# Altium PCB Chess Clock Front Display PCB.PcbDoc
Units mm, origin at the board's own origin, x right, y up, seen from the top; angles counter-clockwise.
Board outline 175 x 60 mm, 2 copper layers (Top Layer, Bottom Layer); 118 components, 110 nets, 374 pads, 173 vias.
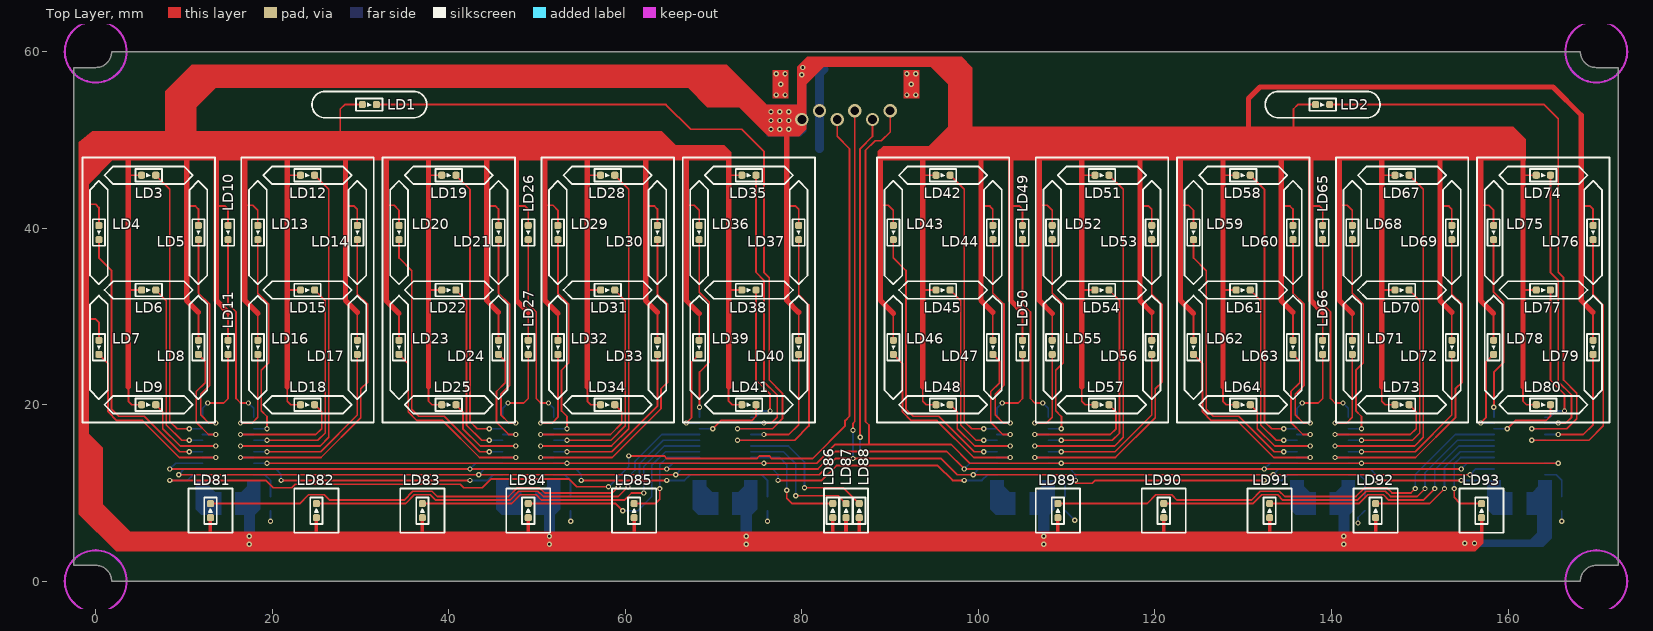
[diagram p0: Top Layer view]
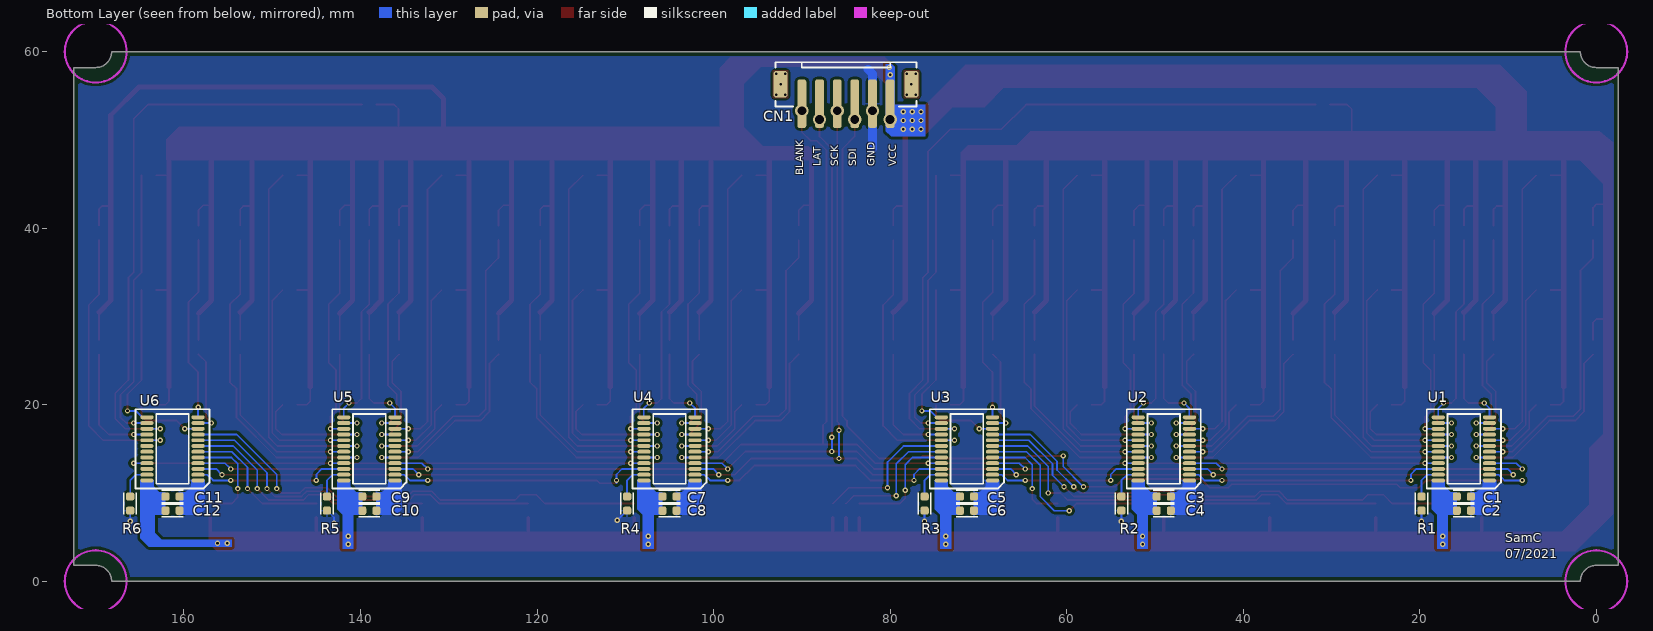
[diagram p1: Bottom Layer view, seen from below]
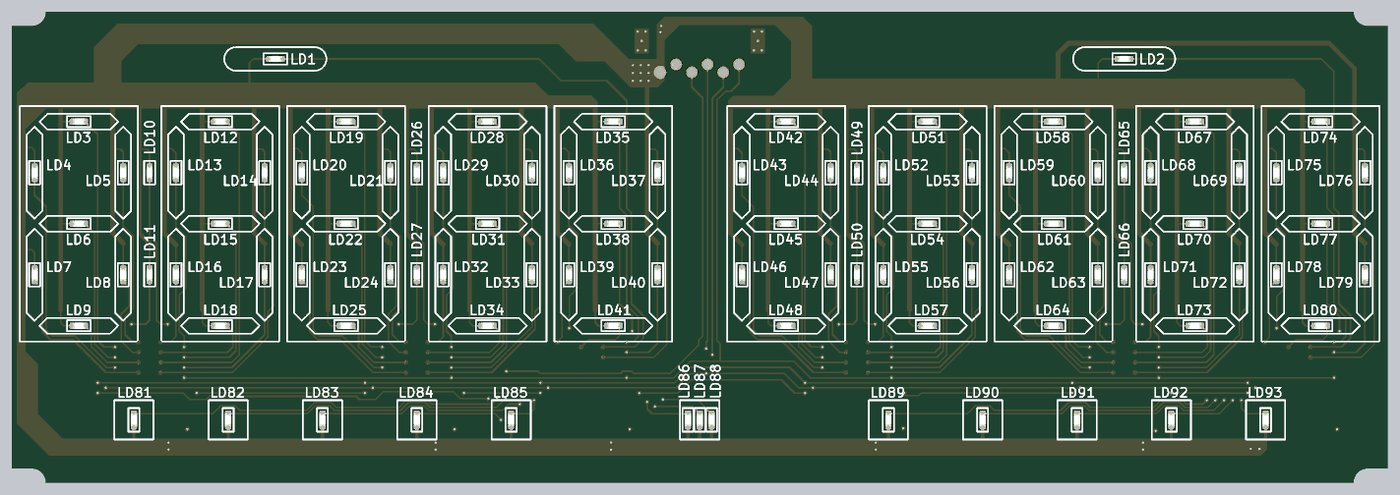
[diagram p2: 3D render of the assembled board from above, using the file's embedded part models]
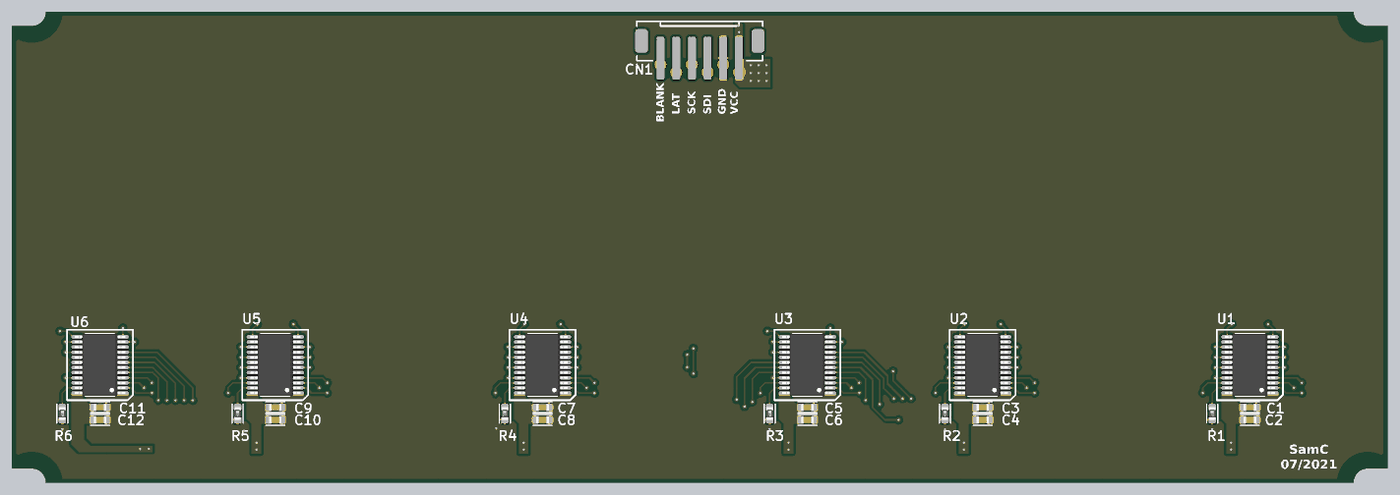
[diagram p3: 3D render of the assembled board from below, using the file's embedded part models]

## Layer stack, top to bottom
Top Solder: solder mask 0.0102, Solder Resist, Dk 3.5
Top Layer: signal copper 0.0356
Dielectric 1: dielectric 0.32, FR-4, Dk 4.8
Bottom Layer: signal copper 0.0356
Bottom Solder: solder mask 0.0102, Solder Resist, Dk 3.5

## Board outline
-2.5,1.8 0,1.8 cw(c0,0) 1.8,0 168.2,0 cw(c170,0) 170,1.8 172.5,1.8 172.5,58.2 170,58.2 cw(c170,60) 168.2,60 1.8,60 cw(c0,60) 0,58.2 -2.5,58.2

## Design rules (kind name [scope] priority, off if disabled: settings)
BoardOutlineClearance [All] p1: gap=0.5 ignorepadtopadclearanceinfootprint=FALSE
Clearance [All] p1: gap=0.3 ignorepadtopadclearanceinfootprint=FALSE except(0.2: Arc-Arc Arc-Track Arc-SMDPad Arc-THPad Arc-Via Arc-Text Arc-Hole Track-Track Track-SMDPad Track-THPad Track-Via Track-Text Track-Hole SMDPad-SMDPad SMDPad-THPad SMDPad-Via SMDPad-Text SMDPad-Hole THPad-THPad THPad-Via THPad-Text THPad-Hole Via-Via Via-Text Via-Hole Text-Text Text-Hole)
DiffPairsRouting [All] p1: maxlimit=0.5 minlimit=0.15 mostfreqgap=0.2 toplayer_minwidth=0.15 toplayer_maxwidth=1 toplayer_prefwidth=0.2 bottomlayer_minwidth=0.15 bottomlayer_maxwidth=1 bottomlayer_prefwidth=0.2 maxuncoupledlength=12.7
HoleSize [All] p1: absolutevalues=TRUE maxlimit=6 minlimit=0.025 maxpercent=80.000 minpercent=20.000
MinimumSolderMaskSliver [All] p1: minsoldermaskwidth=0
PlaneClearance [All] p1: clearance=0.5
PlaneConnect [All] p1: planeconnectstyle=Relief reliefexpansion=0.5 reliefentries=4 reliefconductorwidth=0.25 reliefairgap=0.25
PolygonConnect [All] p1: connectstyle=Relief reliefconductorwidth=0.25 reliefentries=4 polygonreliefangle="90 Angle" airgapwidth=0.25
RoutingVias [All] p1: holewidth=0.3 width=0.6 viastyle="Through Hole" minholewidth=0.3 minwidth=0.5 maxholewidth=2 maxwidth=7
SilkToSilkClearance [All] p1: silktosilkclearance=0
SilkToSolderMaskClearance [IsPad] p1: minsilkscreentomaskgap=0 clearancetoexposedcopper=TRUE
SolderMaskExpansion [All] p1: expansion=0.102 istentingtop=FALSE
Width [All] p1: maxlimit=20 minlimit=0.15 preferedwidth=0.2
23 further rules are at their usual default settings.

## Classes and differential pairs
net class DIG9_SEG[6..0]: DIG9_SEG0 DIG9_SEG1 DIG9_SEG2 DIG9_SEG3 DIG9_SEG4 DIG9_SEG5 DIG9_SEG6
net class DIG8_SEG[6..0]: DIG8_SEG0 DIG8_SEG1 DIG8_SEG2 DIG8_SEG3 DIG8_SEG4 DIG8_SEG5 DIG8_SEG6
net class DIG7_SEG[6..0]: DIG7_SEG0 DIG7_SEG1 DIG7_SEG2 DIG7_SEG3 DIG7_SEG4 DIG7_SEG5 DIG7_SEG6
net class DIG6_SEG[6..0]: DIG6_SEG0 DIG6_SEG1 DIG6_SEG2 DIG6_SEG3 DIG6_SEG4 DIG6_SEG5 DIG6_SEG6
net class DIG5_SEG[6..0]: DIG5_SEG0 DIG5_SEG1 DIG5_SEG2 DIG5_SEG3 DIG5_SEG4 DIG5_SEG5 DIG5_SEG6
net class DOT[7..0]: DOT0 DOT1 DOT2 DOT3 DOT4 DOT5 DOT6 DOT7
net class STATUS[11..1]: STATUS1 STATUS2 STATUS3 STATUS4 STATUS5 STATUS7 STATUS8 STATUS9 STATUS10 STATUS11
net class DIG4_SEG[6..0]: DIG4_SEG0 DIG4_SEG1 DIG4_SEG2 DIG4_SEG3 DIG4_SEG4 DIG4_SEG5 DIG4_SEG6
net class DIG3_SEG[6..0]: DIG3_SEG0 DIG3_SEG1 DIG3_SEG2 DIG3_SEG3 DIG3_SEG4 DIG3_SEG5 DIG3_SEG6
net class DIG2_SEG[6..0]: DIG2_SEG0 DIG2_SEG1 DIG2_SEG2 DIG2_SEG3 DIG2_SEG4 DIG2_SEG5 DIG2_SEG6
net class DIG1_SEG[6..0]: DIG1_SEG0 DIG1_SEG1 DIG1_SEG2 DIG1_SEG3 DIG1_SEG4 DIG1_SEG5 DIG1_SEG6
net class DIG0_SEG[6..0]: DIG0_SEG0 DIG0_SEG1 DIG0_SEG2 DIG0_SEG3 DIG0_SEG4 DIG0_SEG5 DIG0_SEG6

## Components (designator, comment, footprint, x,y, rotation, side; value= is the part's Value field where it differs from the comment)
C1 "100nF" CAPC0603X08N 15,9.6 r180 bottom
C2 "2.2uF" CAPC0603X08N 15,8 r180 bottom
C3 "100nF" CAPC0603X08N 49,9.6 r180 bottom
C4 "2.2uF" CAPC0603X08N 49,8 r180 bottom
C5 "100nF" CAPC0603X08N 71.3,9.6 r180 bottom
C6 "2.2uF" CAPC0603X08N 71.3,8 r180 bottom
C7 "100nF" CAPC0603X08N 105,9.6 r180 bottom
C8 "2.2uF" CAPC0603X08N 105,8 r180 bottom
C9 "100nF" CAPC0603X08N 139,9.6 r180 bottom
C10 "2.2uF" CAPC0603X08N 139,8 r180 bottom
C11 "100nF" CAPC0603X08N 161.3,9.6 r180 bottom
C12 "2.2uF" CAPC0603X08N 161.3,8 r180 bottom
CN1 "B6B-PH-SM4-TBT(LF)(SN)" B6B-PH-SM4-TBT(LF)(SN) 85,55.2 r180 bottom
LD1 "LED 0603" "LED 0603" 31,54 r0 top locked
LD2 "LED 0603" "LED 0603" 139,54 r0 top locked
LD3 "LED 0603" "LED 0603" 6,46 r0 top locked
LD4 "LED 0603" "LED 0603" 0.364,39.5 r270 top locked
LD5 "LED 0603" "LED 0603" 11.636,39.5 r270 top locked
LD6 "LED 0603" "LED 0603" 6,33 r0 top locked
LD7 "LED 0603" "LED 0603" 0.364,26.5 r270 top locked
LD8 "LED 0603" "LED 0603" 11.636,26.5 r270 top locked
LD9 "LED 0603" "LED 0603" 6,20 r0 top locked
LD10 "LED 0603" "LED 0603" 15,39.5 r270 top locked
LD11 "LED 0603" "LED 0603" 15,26.5 r270 top locked
LD12 "LED 0603" "LED 0603" 24,46 r0 top locked
LD13 "LED 0603" "LED 0603" 18.364,39.5 r270 top locked
LD14 "LED 0603" "LED 0603" 29.636,39.5 r270 top locked
LD15 "LED 0603" "LED 0603" 24,33 r0 top locked
LD16 "LED 0603" "LED 0603" 18.364,26.5 r270 top locked
LD17 "LED 0603" "LED 0603" 29.636,26.5 r270 top locked
LD18 "LED 0603" "LED 0603" 24,20 r0 top locked
LD19 "LED 0603" "LED 0603" 40,46 r0 top locked
LD20 "LED 0603" "LED 0603" 34.364,39.5 r270 top locked
LD21 "LED 0603" "LED 0603" 45.636,39.5 r270 top locked
LD22 "LED 0603" "LED 0603" 40,33 r0 top locked
LD23 "LED 0603" "LED 0603" 34.364,26.5 r270 top locked
LD24 "LED 0603" "LED 0603" 45.636,26.5 r270 top locked
LD25 "LED 0603" "LED 0603" 40,20 r0 top locked
LD26 "LED 0603" "LED 0603" 49,39.5 r270 top locked
LD27 "LED 0603" "LED 0603" 49,26.5 r270 top locked
LD28 "LED 0603" "LED 0603" 58,46 r0 top locked
LD29 "LED 0603" "LED 0603" 52.364,39.5 r270 top locked
LD30 "LED 0603" "LED 0603" 63.636,39.5 r270 top locked
LD31 "LED 0603" "LED 0603" 58,33 r0 top locked
LD32 "LED 0603" "LED 0603" 52.364,26.5 r270 top locked
LD33 "LED 0603" "LED 0603" 63.636,26.5 r270 top locked
LD34 "LED 0603" "LED 0603" 58,20 r0 top locked
LD35 "LED 0603" "LED 0603" 74,46 r0 top locked
LD36 "LED 0603" "LED 0603" 68.364,39.5 r270 top locked
LD37 "LED 0603" "LED 0603" 79.636,39.5 r270 top locked
LD38 "LED 0603" "LED 0603" 74,33 r0 top locked
LD39 "LED 0603" "LED 0603" 68.364,26.5 r270 top locked
LD40 "LED 0603" "LED 0603" 79.636,26.5 r270 top locked
LD41 "LED 0603" "LED 0603" 74,20 r0 top locked
LD42 "LED 0603" "LED 0603" 96,46 r0 top locked
LD43 "LED 0603" "LED 0603" 90.364,39.5 r270 top locked
LD44 "LED 0603" "LED 0603" 101.636,39.5 r270 top locked
LD45 "LED 0603" "LED 0603" 96,33 r0 top locked
LD46 "LED 0603" "LED 0603" 90.364,26.5 r270 top locked
LD47 "LED 0603" "LED 0603" 101.636,26.5 r270 top locked
LD48 "LED 0603" "LED 0603" 96,20 r0 top locked
LD49 "LED 0603" "LED 0603" 105,39.5 r270 top locked
LD50 "LED 0603" "LED 0603" 105,26.5 r270 top locked
LD51 "LED 0603" "LED 0603" 114,46 r0 top locked
LD52 "LED 0603" "LED 0603" 108.364,39.5 r270 top locked
LD53 "LED 0603" "LED 0603" 119.636,39.5 r270 top locked
LD54 "LED 0603" "LED 0603" 114,33 r0 top locked
LD55 "LED 0603" "LED 0603" 108.364,26.5 r270 top locked
LD56 "LED 0603" "LED 0603" 119.636,26.5 r270 top locked
LD57 "LED 0603" "LED 0603" 114,20 r0 top locked
LD58 "LED 0603" "LED 0603" 130,46 r0 top locked
LD59 "LED 0603" "LED 0603" 124.364,39.5 r270 top locked
LD60 "LED 0603" "LED 0603" 135.636,39.5 r270 top locked
LD61 "LED 0603" "LED 0603" 130,33 r0 top locked
LD62 "LED 0603" "LED 0603" 124.364,26.5 r270 top locked
LD63 "LED 0603" "LED 0603" 135.636,26.5 r270 top locked
LD64 "LED 0603" "LED 0603" 130,20 r0 top locked
LD65 "LED 0603" "LED 0603" 139,39.5 r270 top locked
LD66 "LED 0603" "LED 0603" 139,26.5 r270 top locked
LD67 "LED 0603" "LED 0603" 148,46 r0 top locked
LD68 "LED 0603" "LED 0603" 142.364,39.5 r270 top locked
LD69 "LED 0603" "LED 0603" 153.636,39.5 r270 top locked
LD70 "LED 0603" "LED 0603" 148,33 r0 top locked
LD71 "LED 0603" "LED 0603" 142.364,26.5 r270 top locked
LD72 "LED 0603" "LED 0603" 153.636,26.5 r270 top locked
LD73 "LED 0603" "LED 0603" 148,20 r0 top locked
LD74 "LED 0603" "LED 0603" 164,46 r0 top locked
LD75 "LED 0603" "LED 0603" 158.364,39.5 r270 top locked
LD76 "LED 0603" "LED 0603" 169.636,39.5 r270 top locked
LD77 "LED 0603" "LED 0603" 164,33 r0 top locked
LD78 "LED 0603" "LED 0603" 158.364,26.5 r270 top locked
LD79 "LED 0603" "LED 0603" 169.636,26.5 r270 top locked
LD80 "LED 0603" "LED 0603" 164,20 r0 top locked
LD81 "LED 0603" "LED 0603" 13,8 r90 top locked
LD82 "LED 0603" "LED 0603" 25,8 r90 top locked
LD83 "LED 0603" "LED 0603" 37,8 r90 top locked
LD84 "LED 0603" "LED 0603" 49,8 r90 top locked
LD85 "LED 0603" "LED 0603" 61,8 r90 top locked
LD86 "LED 0603" "LED 0603" 83.5,8 r90 top locked
LD87 "LED 0603" "LED 0603" 85,8 r90 top locked
LD88 "LED 0603" "LED 0603" 86.5,8 r90 top locked
LD89 "LED 0603" "LED 0603" 109,8 r90 top locked
LD90 "LED 0603" "LED 0603" 121,8 r90 top locked
LD91 "LED 0603" "LED 0603" 133,8 r90 top locked
LD92 "LED 0603" "LED 0603" 145,8 r90 top locked
LD93 "LED 0603" "LED 0603" 157,8 r90 top locked
R1 "6K8" RESC0603X04N 19.8,8.8 r270 bottom
R2 "6K8" RESC0603X04N 53.8,8.8 r270 bottom
R3 "6K8" RESC0603X04N 76.1,8.8 r270 bottom
R4 "6K8" RESC0603X04N 109.8,8.8 r270 bottom
R5 "6K8" RESC0603X04N 143.8,8.8 r270 bottom
R6 "6K8" RESC0603X04N 166.1,8.8 r270 bottom
U1 "TLC5928PW" TSOP65P640X120-24N 15,15 r0 bottom locked
U2 "TLC5928PW" TSOP65P640X120-24N 49,15 r0 bottom locked
U3 "TLC5928PW" TSOP65P640X120-24N 71.3,15 r0 bottom
U4 "TLC5928PW" TSOP65P640X120-24N 105,15 r0 bottom locked
U5 "TLC5928PW" TSOP65P640X120-24N 139,15 r0 bottom locked
U6 "TLC5928PW" TSOP65P640X120-24N 161.3,15 r0 bottom locked

## Footprints (in the part's own frame and the unit in brackets; to place one, negate y for a bottom-side part, rotate by r counter-clockwise, add the part's x,y. Pads: shape width x height; smd on the part's side, far side on the other; paste and mask are expansions set on the pad)
B6B-PH-SM4-TBT(LF)(SN) [mm] "CONN HEADER SMD 6POS 2MM"
  rrect50% 1.6x3 smd: 0(-7.4,1.1) 0(7.4,1.1)
  rrect50% 1x5.5 smd: 1(-5,-1.1) 2(-3,-1.1) 3(-1,-1.1) 4(1,-1.1) 5(3,-1.1) 6(5,-1.1)
  silkscreen extent -8,-1.4 8,3.6
CAPC0603X08N [mm] "Chip Capacitor, 2-Leads, Body 1.60x0.80mm, IPC Medium Density"
  rrect50% 0.9x0.95 smd: 1(-0.8,0) 2(0.8,0)
  silkscreen extent -1.2,-0.7 1.2,0.7, body extent -0.8,-0.41 0.8,0.41, height 0.84
"LED 0603" [mm] "LED 0603"
  rrect50% 0.8x0.8 smd: 1(-0.8,0) 2(0.8,0)
  silkscreen extent -1.5,-0.7 1.5,0.7, body extent -0.8,-0.4 0.8,0.4, height 0.29
RESC0603X04N [mm] "Chip Resistor, 2-Leads, Body 1.60x0.80mm, IPC Medium Density"
  rrect50% 0.9x0.95 smd: 1(-0.8,0) 2(0.8,0)
  silkscreen extent -1.2,-0.7 1.2,0.7, body extent -0.8,-0.4 0.8,0.4, height 0.46
TSOP65P640X120-24N [mm] "TSOP, 24-Leads, Body 7.80x4.40mm, Pitch 0.65mm, IPC Medium Density"
  oval 1.5x0.45 smd: 1(-2.9,3.575) 2(-2.9,2.925) 3(-2.9,2.275) 4(-2.9,1.625) 5(-2.9,0.975) 6(-2.9,0.325) 7(-2.9,-0.325) 8(-2.9,-0.975) 9(-2.9,-1.625) 10(-2.9,-2.275) 11(-2.9,-2.925) 12(-2.9,-3.575) 13(2.9,-3.575) 14(2.9,-2.925) 15(2.9,-2.275) 16(2.9,-1.625) 17(2.9,-0.975) 18(2.9,-0.325) 19(2.9,0.325) 20(2.9,0.975) 21(2.9,1.625) 22(2.9,2.275) 23(2.9,2.925) 24(2.9,3.575)
  silkscreen extent -4.2,-4.5 4.2,4.5, body extent -3.2,-3.95 3.2,3.95, height 1.2

## Part data
C1 C2 C3 C4 C5 C6 C7 C8 C9 C10 C11 C12: library part "GENERIC CAPC 0603", "Generic 0603 Capacitors", Manufacturer=-, Package=0603, Categories=Capacitors, Manufacturer Part Number=-, Supplier 1=Digi-Key, Supplier 2=LCSC, Supplier Part Number 1=-, Supplier Part Number 2=-, Temperature Coefficient=-, Tolerance=-, Voltage - Rated=-
  C1 C3 C5 C7 C9 C11: Capacitance=100nF
  C2 C4 C6 C8 C10 C12: Capacitance=2.2uF
CN1: "Connector Header Surface Mount 6 position 0.079\" (2.00mm)"
LD1 LD2 LD3 LD4 LD5 LD6 LD7 LD8 LD9 LD10 LD11 LD12 LD13 LD14 LD15 LD16 LD17 LD18 LD19 LD20 LD21 LD22 LD23 LD24 LD25 LD26 LD27 LD28 LD29 LD30 LD31 LD32 LD33 LD34 LD35 LD36 LD37 LD38 LD39 LD40 LD41 LD42 LD43 LD44 LD45 LD46 LD47 LD48 LD49 LD50 LD51 LD52 LD53 LD54 LD55 LD56 LD57 LD58 LD59 LD60 LD61 LD62 LD63 LD64 LD65 LD66 LD67 LD68 LD69 LD70 LD71 LD72 LD73 LD74 LD75 LD76 LD77 LD78 LD79 LD80 LD81 LD82 LD83 LD84 LD85 LD86 LD87 LD88 LD89 LD90 LD91 LD92 LD93: Manufacturer=-, Package=0603, Categories=LED, Manufacturer Part Number=-, Supplier 1=Digi-Key, Supplier 2=LCSC, Supplier Part Number 1=-, Supplier Part Number 2=-
R1 R2 R3 R4 R5 R6: library part "GENERIC RESC 0603", "Generic 0603 1%/5% Resistor", Manufacturer=-, Package=0603, Categories=Resistors, Manufacturer Part Number=-, Power (Watts)=-, Resistance=6K8, Supplier 1=Digi-Key, Supplier 2=LCSC, Supplier Part Number 1=-, Supplier Part Number 2=-, Temperature Coefficient=-, Tolerance=-
U1 U2 U3 U4 U5 U6: "LED Driver IC 16 Output Linear Shift Register  Dimming 35mA 24-TSSOP", Manufacturer="Texas Instruments", Package=24-TSSOP, Supplier Part Number 1=296-23819-5-ND, Categories="LED Drivers", Manufacturer Part Number=TLC5928PW, Supplier 1=Digi-Key, Supplier 2=LCSC, Supplier Part Number 2=C1554293

## Via types
v1: diameter 0.6, hole 0.3, Top Layer to Bottom Layer, tented both sides, 167 vias
v2: diameter 1.5, hole 1, Top Layer to Bottom Layer, 6 vias

## Nets (pads, with @x,y where several pads share a name; then routed paths per layer and width w, separated by ;. In a path a pad name is that pad's centre, name@x,y a point inside that pad or via, vN(x,y) a via of type N, cw(c..) or ccw(c..) an arc to the next point about the centre after c; other vN are vias at no path point)
BLANK: CN1.1 U1.21 U2.21 U3.21 U4.21 U5.21 U6.21 | length 196.6
  Top Layer w0.2: v1(19.4,13.375) v1(53.4,13.375) v1(75.7,13.375) 81.675,13.375 83.8,15.5 87.6,15.5 ; v2(90,53.3) 90,50.9 89,49.9 88.3,49.9 87.2,48.8 87.2,18.1 87.6,17.7 87.6,15.5 ; v1(165.7,13.375) v1(143.4,13.375) v1(109.4,13.375) 99.025,13.375 96.9,15.5 87.6,15.5
  Bottom Layer w0.2: U1.21 v1(19.4,13.375) ; U2.21 v1(53.4,13.375) ; U3.21 v1(75.7,13.375) ; U4.21 v1(109.4,13.375) ; U5.21 v1(143.4,13.375) ; U6.21 v1(165.7,13.375)
DIG0_SEG0: LD3.2 U1.10 | length 32.6
  Top Layer w0.2: LD3.2 8.4,44.4 8.4,18.1 9.225,17.275 v1(10.6,17.275)
  Bottom Layer w0.2: v1(10.6,17.275) U1.10
DIG0_SEG1: LD4.2 U1.6 | length 32.1
  Top Layer w0.2: LD4.2 0.364,36.636 1.8,35.2 1.8,19.5 2.6,18.7 5.5,18.7 9.525,14.675 v1(10.6,14.675)
  Bottom Layer w0.2: v1(10.6,14.675) U1.6
DIG0_SEG2: LD5.2 U1.11 | length 24.4
  Top Layer w0.2: LD5.2 11.636,32.664 12.9,31.4 12.9,22.2 11.9,21.2 11.9,18.85 12.825,17.925 v1(13.6,17.925)
  Bottom Layer w0.2: U1.11 v1(13.6,17.925)
DIG0_SEG3: LD6.2 U1.8 | length 20.6
  Top Layer w0.2: LD6.2 8,31.8 8,17.7 9.725,15.975 v1(10.6,15.975)
  Bottom Layer w0.2: v1(10.6,15.975) U1.8
DIG0_SEG4: LD7.2 U1.5 | length 22.8
  Top Layer w0.2: LD7.2 1.4,24.664 1.4,19.2 2.4,18.2 5.3,18.2 9.475,14.025 v1(13.6,14.025)
  Bottom Layer w0.2: U1.5 v1(13.6,14.025)
DIG0_SEG5: LD8.2 U1.9 | length 12.7
  Top Layer w0.2: LD8.2 12.4,24.936 12.4,22.5 11.4,21.5 11.4,18 12.775,16.625 v1(13.6,16.625)
  Bottom Layer w0.2: U1.9 v1(13.6,16.625)
DIG0_SEG6: LD9.2 U1.7 | length 11.3
  Top Layer w0.2: LD9.2 7.6,19.2 7.6,17.3 9.575,15.325 v1(13.6,15.325)
  Bottom Layer w0.2: U1.7 v1(13.6,15.325)
DIG1_SEG0: LD12.2 U1.18 | length 42.3
  Top Layer w0.2: v1(16.4,15.325) 25.425,15.325 26.4,16.3 26.4,44.4 LD12.2
  Bottom Layer w0.2: v1(16.4,15.325) U1.18
DIG1_SEG1: LD13.2 U1.15 | length 24
  Top Layer w0.2: LD13.2 18.364,32.636 19.6,31.4 19.6,24.736 18.764,23.9 18.764,19.3 19.4,18.664 v1(19.4,17.275)
  Bottom Layer w0.2: U1.15 v1(19.4,17.275)
DIG1_SEG2: LD14.2 U1.20 | length 38
  Top Layer w0.2: v1(16.4,14.025) 25.525,14.025 30.036,18.536 30.036,21.8 30.8,22.564 30.8,31.372 29.636,32.536 LD14.2
  Bottom Layer w0.2: v1(16.4,14.025) U1.20
DIG1_SEG3: LD15.2 U1.17 | length 25.1
  Top Layer w0.2: v1(19.4,15.975) 25.175,15.975 26,16.8 26,31.8 LD15.2
  Bottom Layer w0.2: U1.17 v1(19.4,15.975)
DIG1_SEG4: LD16.2 U1.14 | length 10.8
  Top Layer w0.2: v1(16.4,17.925) 17.7,17.925 18.364,18.589 LD16.2
  Bottom Layer w0.2: v1(16.4,17.925) U1.14
DIG1_SEG5: LD17.2 U1.19 | length 20.3
  Top Layer w0.2: v1(19.4,14.675) 25.475,14.675 29.636,18.836 LD17.2
  Bottom Layer w0.2: U1.19 v1(19.4,14.675)
DIG1_SEG6: LD18.2 U1.16 | length 14
  Top Layer w0.2: v1(16.4,16.625) 24.925,16.625 25.6,17.3 25.6,19.2 LD18.2
  Bottom Layer w0.2: v1(16.4,16.625) U1.16
DIG2_SEG0: LD19.2 U2.10 | length 32.6
  Top Layer w0.2: LD19.2 42.4,44.4 42.4,18.1 43.225,17.275 v1(44.6,17.275)
  Bottom Layer w0.2: v1(44.6,17.275) U2.10
DIG2_SEG1: LD20.2 U2.6 | length 32.1
  Top Layer w0.2: LD20.2 34.364,36.636 35.8,35.2 35.8,19.5 36.6,18.7 39.5,18.7 43.525,14.675 v1(44.6,14.675)
  Bottom Layer w0.2: v1(44.6,14.675) U2.6
DIG2_SEG2: LD21.2 U2.11 | length 24.4
  Top Layer w0.2: LD21.2 45.636,32.664 46.9,31.4 46.9,22.2 45.9,21.2 45.9,18.85 46.825,17.925 v1(47.6,17.925)
  Bottom Layer w0.2: U2.11 v1(47.6,17.925)
DIG2_SEG3: LD22.2 U2.8 | length 20.6
  Top Layer w0.2: LD22.2 42,31.8 42,17.7 43.725,15.975 v1(44.6,15.975)
  Bottom Layer w0.2: v1(44.6,15.975) U2.8
DIG2_SEG4: LD23.2 U2.5 | length 22.8
  Top Layer w0.2: LD23.2 35.4,24.664 35.4,19.2 36.4,18.2 39.3,18.2 43.475,14.025 v1(47.6,14.025)
  Bottom Layer w0.2: U2.5 v1(47.6,14.025)
DIG2_SEG5: LD24.2 U2.9 | length 12.7
  Top Layer w0.2: LD24.2 46.4,24.936 46.4,22.5 45.4,21.5 45.4,18 46.775,16.625 v1(47.6,16.625)
  Bottom Layer w0.2: U2.9 v1(47.6,16.625)
DIG2_SEG6: LD25.2 U2.7 | length 11.3
  Top Layer w0.2: LD25.2 41.6,19.2 41.6,17.3 43.575,15.325 v1(47.6,15.325)
  Bottom Layer w0.2: U2.7 v1(47.6,15.325)
DIG3_SEG0: LD28.2 U2.18 | length 41.7
  Top Layer w0.2: v1(50.4,15.325) 58.425,15.325 60.4,17.3 60.4,44.4 LD28.2
  Bottom Layer w0.2: v1(50.4,15.325) U2.18
DIG3_SEG1: LD29.2 U2.15 | length 24
  Top Layer w0.2: LD29.2 52.364,32.636 53.6,31.4 53.6,24.736 52.764,23.9 52.764,19.3 53.4,18.664 v1(53.4,17.275)
  Bottom Layer w0.2: U2.15 v1(53.4,17.275)
DIG3_SEG2: LD30.2 U2.20 | length 37.4
  Top Layer w0.2: v1(50.4,14.025) 58.525,14.025 64.036,19.536 64.036,21.8 64.8,22.564 64.8,31.372 63.636,32.536 LD30.2
  Bottom Layer w0.2: v1(50.4,14.025) U2.20
DIG3_SEG3: LD31.2 U2.17 | length 24.7
  Top Layer w0.2: v1(53.4,15.975) 58.375,15.975 60,17.6 60,31.8 LD31.2
  Bottom Layer w0.2: U2.17 v1(53.4,15.975)
DIG3_SEG4: LD32.2 U2.14 | length 10.8
  Top Layer w0.2: v1(50.4,17.925) 51.7,17.925 52.364,18.589 LD32.2
  Bottom Layer w0.2: v1(50.4,17.925) U2.14
DIG3_SEG5: LD33.2 U2.19 | length 19.7
  Top Layer w0.2: v1(53.4,14.675) 58.475,14.675 63.636,19.836 LD33.2
  Bottom Layer w0.2: U2.19 v1(53.4,14.675)
DIG3_SEG6: LD34.2 U2.16 | length 13.7
  Top Layer w0.2: v1(50.4,16.625) 58.325,16.625 59.6,17.9 59.6,19.2 LD34.2
  Bottom Layer w0.2: v1(50.4,16.625) U2.16
DIG4_SEG0: LD35.2 U3.14 | length 31.7
  Top Layer w0.2: LD35.2 74.8,35 75.7,34.1 75.7,22.6 77.2,21.1 77.2,18.6 76.525,17.925 v1(75.7,17.925)
  Bottom Layer w0.2: U3.14 v1(75.7,17.925)
DIG4_SEG1: LD36.2 U3.12 | length 21.1
  Top Layer w0.2: LD36.2 68.364,32.736 69.5,31.6 69.5,24.8 68.4,23.7 v1(68.4,19.7)
  Bottom Layer w0.2: U3.12 v1(68.4,19.7)
DIG4_SEG2: LD37.2 U3.17 | length 31.9
  Top Layer w0.2: v1(72.7,15.975) 79.175,15.975 80.8,17.6 80.8,31.3 79.636,32.464 LD37.2
  Bottom Layer w0.2: v1(72.7,15.975) U3.17
DIG4_SEG3: LD38.2 U3.13 | length 16.9
  Top Layer w0.2: LD38.2 74.8,22.8 76.4,21.2 v1(76.4,19.3)
  Bottom Layer w0.2: U3.13 74.725,18.575 75.45,19.3 v1(76.4,19.3)
DIG4_SEG4: LD39.2 U3.11 | length 9.9
  Top Layer w0.2: v1(66.9,17.925) 67.5,18.525 67.5,24.836 LD39.2
  Bottom Layer w0.2: v1(66.9,17.925) U3.11
DIG4_SEG5: LD40.2 U3.16 | length 13.9
  Top Layer w0.2: v1(75.7,16.625) 78.525,16.625 79.636,17.736 LD40.2
  Bottom Layer w0.2: U3.16 v1(75.7,16.625)
DIG4_SEG6: LD41.2 U3.10 | length 8.3
  Top Layer w0.2: v1(69.9,17.275) 70.825,18.2 74.3,18.2 74.8,18.7 LD41.2
  Bottom Layer w0.2: U3.10 v1(69.9,17.275)
DIG5_SEG0: LD42.2 U4.10 | length 32.6
  Top Layer w0.2: LD42.2 98.4,44.4 98.4,18.1 99.225,17.275 v1(100.6,17.275)
  Bottom Layer w0.2: v1(100.6,17.275) U4.10
DIG5_SEG1: LD43.2 U4.6 | length 32.1
  Top Layer w0.2: LD43.2 90.364,36.636 91.8,35.2 91.8,19.5 92.6,18.7 95.5,18.7 99.525,14.675 v1(100.6,14.675)
  Bottom Layer w0.2: v1(100.6,14.675) U4.6
DIG5_SEG2: LD44.2 U4.11 | length 24.4
  Top Layer w0.2: LD44.2 101.636,32.664 102.9,31.4 102.9,22.2 101.9,21.2 101.9,18.85 102.825,17.925 v1(103.6,17.925)
  Bottom Layer w0.2: U4.11 v1(103.6,17.925)
DIG5_SEG3: LD45.2 U4.8 | length 20.6
  Top Layer w0.2: LD45.2 98,31.8 98,17.7 99.725,15.975 v1(100.6,15.975)
  Bottom Layer w0.2: v1(100.6,15.975) U4.8
DIG5_SEG4: LD46.2 U4.5 | length 22.8
  Top Layer w0.2: LD46.2 91.4,24.664 91.4,19.2 92.4,18.2 95.3,18.2 99.475,14.025 v1(103.6,14.025)
  Bottom Layer w0.2: U4.5 v1(103.6,14.025)
DIG5_SEG5: LD47.2 U4.9 | length 12.7
  Top Layer w0.2: LD47.2 102.4,24.936 102.4,22.5 101.4,21.5 101.4,18 102.775,16.625 v1(103.6,16.625)
  Bottom Layer w0.2: U4.9 v1(103.6,16.625)
DIG5_SEG6: LD48.2 U4.7 | length 11.3
  Top Layer w0.2: LD48.2 97.6,19.2 97.6,17.3 99.575,15.325 v1(103.6,15.325)
  Bottom Layer w0.2: U4.7 v1(103.6,15.325)
DIG6_SEG0: LD51.2 U4.18 | length 42.3
  Top Layer w0.2: v1(106.4,15.325) 115.425,15.325 116.4,16.3 116.4,44.4 LD51.2
  Bottom Layer w0.2: v1(106.4,15.325) U4.18
DIG6_SEG1: LD52.2 U4.15 | length 24
  Top Layer w0.2: LD52.2 108.364,32.636 109.6,31.4 109.6,24.736 108.764,23.9 108.764,19.3 109.4,18.664 v1(109.4,17.275)
  Bottom Layer w0.2: U4.15 v1(109.4,17.275)
DIG6_SEG2: LD53.2 U4.20 | length 38
  Top Layer w0.2: v1(106.4,14.025) 115.525,14.025 120.036,18.536 120.036,21.8 120.8,22.564 120.8,31.372 119.636,32.536 LD53.2
  Bottom Layer w0.2: v1(106.4,14.025) U4.20
DIG6_SEG3: LD54.2 U4.17 | length 25.1
  Top Layer w0.2: v1(109.4,15.975) 115.175,15.975 116,16.8 116,31.8 LD54.2
  Bottom Layer w0.2: U4.17 v1(109.4,15.975)
DIG6_SEG4: LD55.2 U4.14 | length 10.8
  Top Layer w0.2: v1(106.4,17.925) 107.7,17.925 108.364,18.589 LD55.2
  Bottom Layer w0.2: v1(106.4,17.925) U4.14
DIG6_SEG5: LD56.2 U4.19 | length 20.3
  Top Layer w0.2: v1(109.4,14.675) 115.475,14.675 119.636,18.836 LD56.2
  Bottom Layer w0.2: U4.19 v1(109.4,14.675)
DIG6_SEG6: LD57.2 U4.16 | length 14
  Top Layer w0.2: v1(106.4,16.625) 114.925,16.625 115.6,17.3 115.6,19.2 LD57.2
  Bottom Layer w0.2: v1(106.4,16.625) U4.16
DIG7_SEG0: LD58.2 U5.10 | length 32.6
  Top Layer w0.2: LD58.2 132.4,44.4 132.4,18.1 133.225,17.275 v1(134.6,17.275)
  Bottom Layer w0.2: v1(134.6,17.275) U5.10
DIG7_SEG1: LD59.2 U5.6 | length 32.1
  Top Layer w0.2: LD59.2 124.364,36.636 125.8,35.2 125.8,19.5 126.6,18.7 129.5,18.7 133.525,14.675 v1(134.6,14.675)
  Bottom Layer w0.2: v1(134.6,14.675) U5.6
DIG7_SEG2: LD60.2 U5.11 | length 24.4
  Top Layer w0.2: LD60.2 135.636,32.664 136.9,31.4 136.9,22.2 135.9,21.2 135.9,18.85 136.825,17.925 v1(137.6,17.925)
  Bottom Layer w0.2: U5.11 v1(137.6,17.925)
DIG7_SEG3: LD61.2 U5.8 | length 20.6
  Top Layer w0.2: LD61.2 132,31.8 132,17.7 133.725,15.975 v1(134.6,15.975)
  Bottom Layer w0.2: v1(134.6,15.975) U5.8
DIG7_SEG4: LD62.2 U5.5 | length 22.8
  Top Layer w0.2: LD62.2 125.4,24.664 125.4,19.2 126.4,18.2 129.3,18.2 133.475,14.025 v1(137.6,14.025)
  Bottom Layer w0.2: U5.5 v1(137.6,14.025)
DIG7_SEG5: LD63.2 U5.9 | length 12.7
  Top Layer w0.2: LD63.2 136.4,24.936 136.4,22.5 135.4,21.5 135.4,18 136.775,16.625 v1(137.6,16.625)
  Bottom Layer w0.2: U5.9 v1(137.6,16.625)
DIG7_SEG6: LD64.2 U5.7 | length 11.3
  Top Layer w0.2: LD64.2 131.6,19.2 131.6,17.3 133.575,15.325 v1(137.6,15.325)
  Bottom Layer w0.2: U5.7 v1(137.6,15.325)
DIG8_SEG0: LD67.2 U5.18 | length 42.3
  Top Layer w0.2: v1(140.4,15.325) 149.425,15.325 150.4,16.3 150.4,44.4 LD67.2
  Bottom Layer w0.2: v1(140.4,15.325) U5.18
DIG8_SEG1: LD68.2 U5.15 | length 24
  Top Layer w0.2: LD68.2 142.364,32.636 143.6,31.4 143.6,24.736 142.764,23.9 142.764,19.3 143.4,18.664 v1(143.4,17.275)
  Bottom Layer w0.2: U5.15 v1(143.4,17.275)
DIG8_SEG2: LD69.2 U5.20 | length 38
  Top Layer w0.2: v1(140.4,14.025) 149.525,14.025 154.036,18.536 154.036,21.8 154.8,22.564 154.8,31.372 153.636,32.536 LD69.2
  Bottom Layer w0.2: v1(140.4,14.025) U5.20
DIG8_SEG3: LD70.2 U5.17 | length 25.1
  Top Layer w0.2: v1(143.4,15.975) 149.175,15.975 150,16.8 150,31.8 LD70.2
  Bottom Layer w0.2: U5.17 v1(143.4,15.975)
DIG8_SEG4: LD71.2 U5.14 | length 10.8
  Top Layer w0.2: v1(140.4,17.925) 141.7,17.925 142.364,18.589 LD71.2
  Bottom Layer w0.2: v1(140.4,17.925) U5.14
DIG8_SEG5: LD72.2 U5.19 | length 20.3
  Top Layer w0.2: v1(143.4,14.675) 149.475,14.675 153.636,18.836 LD72.2
  Bottom Layer w0.2: U5.19 v1(143.4,14.675)
DIG8_SEG6: LD73.2 U5.16 | length 14
  Top Layer w0.2: v1(140.4,16.625) 148.925,16.625 149.6,17.3 149.6,19.2 LD73.2
  Bottom Layer w0.2: v1(140.4,16.625) U5.16
DIG9_SEG0: LD74.2 U6.14 | length 31.7
  Top Layer w0.2: LD74.2 164.8,35 165.7,34.1 165.7,22.6 167.2,21.1 167.2,18.6 166.525,17.925 v1(165.7,17.925)
  Bottom Layer w0.2: U6.14 v1(165.7,17.925)
DIG9_SEG1: LD75.2 U6.12 | length 21.1
  Top Layer w0.2: LD75.2 158.364,32.736 159.5,31.6 159.5,24.8 158.4,23.7 v1(158.4,19.7)
  Bottom Layer w0.2: U6.12 v1(158.4,19.7)
DIG9_SEG2: LD76.2 U6.17 | length 31.9
  Top Layer w0.2: v1(162.7,15.975) 169.175,15.975 170.8,17.6 170.8,31.3 169.636,32.464 LD76.2
  Bottom Layer w0.2: v1(162.7,15.975) U6.17
DIG9_SEG3: LD77.2 U6.13 | length 16.9
  Top Layer w0.2: LD77.2 164.8,22.8 166.4,21.2 v1(166.4,19.3)
  Bottom Layer w0.2: U6.13 164.725,18.575 165.45,19.3 v1(166.4,19.3)
DIG9_SEG4: LD78.2 U6.11 | length 9.9
  Top Layer w0.2: v1(156.9,17.925) 157.5,18.525 157.5,24.836 LD78.2
  Bottom Layer w0.2: v1(156.9,17.925) U6.11
DIG9_SEG5: LD79.2 U6.16 | length 13.9
  Top Layer w0.2: v1(165.7,16.625) 168.525,16.625 169.636,17.736 LD79.2
  Bottom Layer w0.2: U6.16 v1(165.7,16.625)
DIG9_SEG6: LD80.2 U6.10 | length 8.3
  Top Layer w0.2: v1(159.9,17.275) 160.825,18.2 164.3,18.2 164.8,18.7 LD80.2
  Bottom Layer w0.2: U6.10 v1(159.9,17.275)
DOT0: LD10.2 U1.13 | length 21.9
  Top Layer w0.2: LD10.2 15,31.4 15.9,30.5 15.9,20.7 16.4,20.2 v1(17.3,20.2)
  Bottom Layer w0.2: v1(17.3,20.2) 17.9,19.6 U1.13
DOT1: LD11.2 U1.12 | length 9.4
  Top Layer w0.2: v1(12.7,20.2) 14.5,20.2 15,20.7 LD11.2
  Bottom Layer w0.2: U1.12 12.1,19.6 v1(12.7,20.2)
DOT2: LD26.2 U2.13 | length 21.9
  Top Layer w0.2: LD26.2 49,31.4 49.9,30.5 49.9,20.7 50.4,20.2 v1(51.3,20.2)
  Bottom Layer w0.2: v1(51.3,20.2) 51.9,19.6 U2.13
DOT3: LD27.2 U2.12 | length 9.4
  Top Layer w0.2: v1(46.7,20.2) 48.5,20.2 49,20.7 LD27.2
  Bottom Layer w0.2: U2.12 46.1,19.6 v1(46.7,20.2)
DOT4: LD49.2 U4.13 | length 21.9
  Top Layer w0.2: LD49.2 105,31.4 105.9,30.5 105.9,20.7 106.4,20.2 v1(107.3,20.2)
  Bottom Layer w0.2: v1(107.3,20.2) 107.9,19.6 U4.13
DOT5: LD50.2 U4.12 | length 9.4
  Top Layer w0.2: v1(102.7,20.2) 104.5,20.2 105,20.7 LD50.2
  Bottom Layer w0.2: U4.12 102.1,19.6 v1(102.7,20.2)
DOT6: LD65.2 U5.13 | length 21.9
  Top Layer w0.2: LD65.2 139,31.4 139.9,30.5 139.9,20.7 140.4,20.2 v1(141.3,20.2)
  Bottom Layer w0.2: v1(141.3,20.2) 141.9,19.6 U5.13
DOT7: LD66.2 U5.12 | length 9.4
  Top Layer w0.2: v1(136.7,20.2) 138.5,20.2 139,20.7 LD66.2
  Bottom Layer w0.2: U5.12 136.1,19.6 v1(136.7,20.2)
GND: C1.2 C2.2 C3.2 C4.2 C5.2 C6.2 C7.2 C8.2 C9.2 C10.2 C11.2 C12.2 CN1.5 R1.2 R2.2 R3.2 R4.2 R5.2 R6.2 U1.1 U2.1 U3.1 U4.1 U5.1 U6.1 | length 16.5
  Bottom Layer w0.2: v1(19.8,6.8) R1.2 ; v1(53.8,6.8) R2.2 ; v1(76.1,6.8) R3.2 ; R4.2 109.825,8 v1(110.9,6.925) ; v1(143,6.6) 143,7.225 143.775,8 R5.2 ; v1(166.1,6.8) R6.2
  Bottom Layer w1: 82,49 v2(82,53.3) ; CN1.5 82,57.5 82.5,58
LAT: CN1.2 U1.4 U2.4 U3.4 U4.4 U5.4 U6.4 | length 209.9
  Top Layer w0.2: v1(8.4,12.725) v1(42.4,12.725) v1(64.7,12.725) 81.825,12.725 83.8,14.7 v1(86.6,14.7) 96.425,14.7 v1(98.4,12.725) v1(132.4,12.725) v1(154.7,12.725) ; v1(86.6,16.3) 86.6,49 88,50.4 v2(88,52.3)
  Bottom Layer w0.2: v1(8.4,12.725) 9.05,13.375 U1.4 ; v1(42.4,12.725) 43.05,13.375 U2.4 ; v1(64.7,12.725) 65.35,13.375 U3.4 ; v1(86.6,14.7) v1(86.6,16.3) ; v1(98.4,12.725) 99.05,13.375 U4.4 ; v1(132.4,12.725) 133.05,13.375 U5.4 ; v1(154.7,12.725) 155.35,13.375 U6.4
MAIN_B: LD88.2 U3.18 | length 16.7
  Top Layer w0.2: v1(80.3,10.6) 84.7,10.6 LD88.2
  Bottom Layer w0.2: U3.18 78.475,15.325 80.3,13.5 v1(80.3,10.6)
MAIN_G: LD87.2 U3.19 | length 15.3
  Top Layer w0.2: v1(79.3,9.7) 84.1,9.7 LD87.2
  Bottom Layer w0.2: U3.19 77.925,14.675 79.3,13.3 v1(79.3,9.7)
MAIN_R: LD86.2 U3.20 | length 13.7
  Top Layer w0.2: v1(78.3,10.3) 78.3,9.4 78.9,8.8 LD86.2
  Bottom Layer w0.2: U3.20 77.475,14.025 78.3,13.2 v1(78.3,10.3)
NetR1_1: R1.1 U1.23 | length 4
  Bottom Layer w0.2: U1.23 19.15,12.075 19.8,11.425 R1.1
NetR2_1: R2.1 U2.23 | length 4
  Bottom Layer w0.2: U2.23 53.15,12.075 53.8,11.425 R2.1
NetR3_1: R3.1 U3.23 | length 4
  Bottom Layer w0.2: U3.23 75.45,12.075 76.1,11.425 R3.1
NetR4_1: R4.1 U4.23 | length 4
  Bottom Layer w0.2: U4.23 109.15,12.075 109.8,11.425 R4.1
NetR5_1: R5.1 U5.23 | length 4
  Bottom Layer w0.2: U5.23 143.15,12.075 143.8,11.425 R5.1
NetR6_1: R6.1 U6.23 | length 4
  Bottom Layer w0.2: U6.23 165.45,12.075 166.1,11.425 R6.1
SCK: CN1.3 U1.3 U2.3 U3.3 U4.3 U5.3 U6.3 | length 205.1
  Top Layer w0.2: v1(9.4,12.075) v1(43.4,12.075) v1(65.7,12.075) 81.975,12.075 83.8,13.9 v1(85.8,13.9) 95.8,13.9 97.625,12.075 v1(99.4,12.075) v1(133.4,12.075) v1(155.7,12.075) ; v1(85.8,17.1) 85.8,17.9 86,18.1 v2(86,53.3)
  Bottom Layer w0.2: v1(9.4,12.075) 10.05,12.725 U1.3 ; v1(43.4,12.075) 44.05,12.725 U2.3 ; v1(65.7,12.075) 66.35,12.725 U3.3 ; v1(85.8,13.9) v1(85.8,17.1) ; v1(99.4,12.075) 100.05,12.725 U4.3 ; v1(133.4,12.075) 134.05,12.725 U5.3 ; v1(155.7,12.075) 156.35,12.725 U6.3
SDI0: CN1.4 U1.2 | length 121.5
  Top Layer w0.2: v1(8.4,11.425) 19.275,11.425 20.1,10.6 22.2,10.6 22.6,11 41.3,11 41.7,10.6 43.8,10.6 44.8,11.6 53.6,11.6 54.5,10.7 v1(58.1,10.7) ; v1(60.4,14.2) 64.4,14.2 64.7,13.9 74.9,13.9 75.2,14.2 76.3,14.2 76.6,13.9 81.2,13.9 84.9,17.6 84.9,18.2 85.4,18.7 85.4,49 84,50.4 v2(84,52.3)
  Bottom Layer w0.2: v1(8.4,11.425) 10.4,11.425 11.05,12.075 U1.2 ; v1(58.1,10.7) 60.4,13 v1(60.4,14.2)
SDI1: U1.22 U2.2 | length 29.4
  Top Layer w0.2: v1(21,11.425) v1(42.4,11.425)
  Bottom Layer w0.2: U1.22 20.375,12.725 21,12.1 v1(21,11.425) ; v1(42.4,11.425) 44.4,11.425 45.05,12.075 U2.2
SDI2: U2.22 U3.2 | length 17.7
  Top Layer w0.2: v1(55,11.425) v1(64.7,11.425)
  Bottom Layer w0.2: U2.22 54.375,12.725 55,12.1 v1(55,11.425) ; v1(64.7,11.425) 66.7,11.425 67.35,12.075 U3.2
SDI3: U3.22 U4.2 | length 30.5
  Top Layer w0.2: v1(77.3,11.425) 82.25,11.425 83.925,13.1 95.4,13.1 97.075,11.425 v1(98.4,11.425)
  Bottom Layer w0.2: U3.22 76.675,12.725 77.3,12.1 v1(77.3,11.425) ; v1(98.4,11.425) 100.4,11.425 101.05,12.075 U4.2
SDI4: U4.22 U5.2 | length 29.9
  Top Layer w0.2: 111,11.1 112.9,11.1 113.225,11.425 v1(132.4,11.425)
  Bottom Layer w0.2: U4.22 110.375,12.725 111,12.1 111,11.1 ; v1(132.4,11.425) 134.4,11.425 135.05,12.075 U5.2
  other v1: 111,11.425
SDI5: U5.22 U6.2 | length 17.7
  Top Layer w0.2: v1(145,11.425) v1(154.7,11.425)
  Bottom Layer w0.2: U5.22 144.375,12.725 145,12.1 v1(145,11.425) ; v1(154.7,11.425) 156.7,11.425 157.35,12.075 U6.2
STATUS0: LD1.2 U3.15 | length 84.3
  Top Layer w0.2: LD1.2 64.6,54 67.4,51.2 73.2,51.2 75.7,48.7 75.7,35 76.3,34.4 76.3,22.8 77.8,21.3 77.8,18.4 76.675,17.275 v1(72.7,17.275)
  Bottom Layer w0.2: v1(72.7,17.275) U3.15
STATUS1: LD81.2 U3.9 | length 60.7
  Top Layer w0.2: LD81.2 23.1,8.8 24.1,9.8 25.9,9.8 26.5,9.2 34.934,9.2 35.934,10.2 38.1,10.2 38.7,9.6 46.769,9.6 47.769,10.6 50.266,10.6 50.866,10 58.5,10 v1(59.2,10.7)
  Bottom Layer w0.2: v1(59.2,10.7) 61.1,12.6 61.1,13.6 64.125,16.625 U3.9
STATUS2: LD82.2 U3.8 | length 48.1
  Top Layer w0.2: LD82.2 35.1,8.8 36.1,9.8 37.9,9.8 38.5,9.2 46.934,9.2 47.934,10.2 50.1,10.2 50.7,9.6 59.2,9.6 v1(60.3,10.7)
  Bottom Layer w0.2: v1(60.3,10.7) 61.6,12 61.6,13.3 64.275,15.975 U3.8
STATUS3: LD83.2 U3.7 | length 36.4
  Top Layer w0.2: LD83.2 47.1,8.8 48.1,9.8 49.9,9.8 50.5,9.2 59.9,9.2 60.7,10 v1(62.1,10)
  Bottom Layer w0.2: v1(62.1,10) 62.1,13 64.425,15.325 U3.7
STATUS4: LD84.2 U3.6 | length 24.6
  Top Layer w0.2: LD84.2 58.9,8.8 v1(59.7,8)
  Bottom Layer w0.2: v1(59.7,8) 61.4,8 63,9.6 63,13.125 64.55,14.675 U3.6
STATUS5: LD85.2 U3.5 | length 11.8
  Top Layer w0.2: LD85.2 63.4,8.8 63.9,9.3 v1(63.9,10.5)
  Bottom Layer w0.2: v1(63.9,10.5) 63.9,13.2 64.725,14.025 U3.5
STATUS6: LD2.2 U6.15 | length 68.5
  Top Layer w0.2: LD2.2 164.1,54 165.7,52.4 165.7,35 166.3,34.4 166.3,22.8 167.8,21.3 167.8,18.4 166.675,17.275 v1(162.7,17.275)
  Bottom Layer w0.2: v1(162.7,17.275) U6.15
STATUS7: LD89.2 U6.9 | length 55.1
  Top Layer w0.2: LD89.2 119.1,8.8 120.1,9.8 121.9,9.8 122.5,9.2 130.934,9.2 131.934,10.2 134.1,10.2 134.7,9.6 142.769,9.6 143.769,10.6 146.266,10.6 146.866,10 149,10 v1(149.5,10.5)
  Bottom Layer w0.2: v1(149.5,10.5) 149.5,12.1 154.025,16.625 U6.9
STATUS8: LD90.2 U6.8 | length 42.4
  Top Layer w0.2: LD90.2 131.1,8.8 132.1,9.8 133.9,9.8 134.5,9.2 142.934,9.2 143.934,10.2 146.1,10.2 146.7,9.6 149.7,9.6 v1(150.6,10.5)
  Bottom Layer w0.2: v1(150.6,10.5) 150.6,12.3 154.275,15.975 U6.8
STATUS9: LD91.2 U6.7 | length 29.8
  Top Layer w0.2: LD91.2 143.1,8.8 144.1,9.8 145.9,9.8 146.5,9.2 150.4,9.2 v1(151.7,10.5)
  Bottom Layer w0.2: v1(151.7,10.5) 151.7,12.6 154.425,15.325 U6.7
STATUS10: LD92.2 U6.6 | length 17.2
  Top Layer w0.2: LD92.2 151.1,8.8 v1(152.8,10.5)
  Bottom Layer w0.2: v1(152.8,10.5) 152.8,12.9 154.575,14.675 U6.6
STATUS11: LD93.2 U6.5 | length 12
  Top Layer w0.2: v1(153.9,10.5) 153.9,9.5 154.6,8.8 LD93.2
  Bottom Layer w0.2: v1(153.9,10.5) 153.9,13.3 154.625,14.025 U6.5
VCC: C1.1 C2.1 C3.1 C4.1 C5.1 C6.1 C7.1 C8.1 C9.1 C10.1 C11.1 C12.1 CN1.6 LD1.1 LD2.1 LD3.1 LD4.1 LD5.1 LD6.1 LD7.1 LD8.1 LD9.1 LD10.1 LD11.1 LD12.1 LD13.1 LD14.1 LD15.1 LD16.1 LD17.1 LD18.1 LD19.1 LD20.1 LD21.1 LD22.1 LD23.1 LD24.1 LD25.1 LD26.1 LD27.1 LD28.1 LD29.1 LD30.1 LD31.1 LD32.1 LD33.1 LD34.1 LD35.1 LD36.1 LD37.1 LD38.1 LD39.1 LD40.1 LD41.1 LD42.1 LD43.1 LD44.1 LD45.1 LD46.1 LD47.1 LD48.1 LD49.1 LD50.1 LD51.1 LD52.1 LD53.1 LD54.1 LD55.1 LD56.1 LD57.1 LD58.1 LD59.1 LD60.1 LD61.1 LD62.1 LD63.1 LD64.1 LD65.1 LD66.1 LD67.1 LD68.1 LD69.1 LD70.1 LD71.1 LD72.1 LD73.1 LD74.1 LD75.1 LD76.1 LD77.1 LD78.1 LD79.1 LD80.1 LD81.1 LD82.1 LD83.1 LD84.1 LD85.1 LD86.1 LD87.1 LD88.1 LD89.1 LD90.1 LD91.1 LD92.1 LD93.1 U1.24 U2.24 U3.24 U4.24 U5.24 U6.24 | length 982.4
  Top Layer w0.2: -1,29.7 0,29.7 0.364,29.336 LD7.1 ; -1,42.7 0,42.7 0.364,42.336 LD4.1 ; 3.7,22 3.7,20.4 4.1,20 LD9.1 ; 3.7,33 LD6.1 ; 3.7,46 LD3.1 ; 10.3,42.5 11.3,42.5 11.636,42.164 LD5.1 ; LD8.1 11.636,30.464 ; 13.664,42.5 14.664,42.5 15,42.164 LD10.1 ; LD11.1 15,30.464 ; 16.9,42.6 17.8,42.6 18.364,42.036 LD13.1 ; LD16.1 18.364,30.336 ; 21.7,22 21.7,20.4 22.1,20 LD18.1 ; 21.7,33 LD15.1 ; 21.7,46 LD12.1 ; 27.7,50.6 27.7,53.5 28.2,54 LD1.1 ; 28.3,42.5 29.3,42.5 29.636,42.164 LD14.1 ; LD17.1 29.636,30.464 ; 32.9,42.6 33.8,42.6 34.364,42.036 LD20.1 ; LD23.1 34.364,30.336 ; 37.7,22 37.7,20.4 38.1,20 LD25.1 ; 37.7,33 LD22.1 ; 37.7,46 LD19.1 ; 44.3,42.5 45.3,42.5 45.636,42.164 LD21.1 ; LD24.1 45.636,30.464 ; 47.664,42.5 48.664,42.5 49,42.164 LD26.1 ; LD27.1 49,30.464 ; 50.9,42.6 51.8,42.6 52.364,42.036 LD29.1 ; LD32.1 52.364,30.336 ; 55.7,22 55.7,20.4 56.1,20 LD34.1 ; 55.7,33 LD31.1 ; 55.7,46 LD28.1 ; 62.3,42.5 63.3,42.5 63.636,42.164 LD30.1 ; LD33.1 63.636,30.464 ; 66.9,42.6 67.8,42.6 68.364,42.036 LD36.1 ; LD39.1 68.364,30.336 ; 71.7,22 71.7,20.4 72.1,20 LD41.1 ; 71.7,33 LD38.1 ; 71.7,46 LD35.1 ; 78.3,42.5 79.3,42.5 79.636,42.164 LD37.1 ; LD40.1 79.636,30.464 ; 88.9,42.6 89.8,42.6 90.364,42.036 LD43.1 ; LD46.1 90.364,30.336 ; 93.7,22 93.7,20.4 94.1,20 LD48.1 ; 93.7,33 LD45.1 ; 93.7,46 LD42.1 ; 100.3,42.5 101.3,42.5 101.636,42.164 LD44.1 ; LD47.1 101.636,30.464 ; 103.664,42.5 104.664,42.5 105,42.164 LD49.1 ; LD50.1 105,30.464 ; 106.9,42.6 107.8,42.6 108.364,42.036 LD52.1 ; LD55.1 108.364,30.336 ; 111.7,22 111.7,20.4 112.1,20 LD57.1 ; 111.7,33 LD54.1 ; 111.7,46 LD51.1 ; 118.3,42.5 119.3,42.5 119.636,42.164 LD53.1 ; LD56.1 119.636,30.464 ; 122.9,42.6 123.8,42.6 124.364,42.036 LD59.1 ; LD62.1 124.364,30.336 ; 127.7,22 127.7,20.4 128.1,20 LD64.1 ; 127.7,33 LD61.1 ; 127.7,46 LD58.1 ; 134.3,42.5 135.3,42.5 135.636,42.164 LD60.1 ; LD63.1 135.636,30.464 ; 135.7,51.3 135.7,53.5 136.2,54 LD2.1 ; 137.664,42.5 138.664,42.5 139,42.164 LD65.1 ; LD66.1 139,30.464 ; 140.9,42.6 141.8,42.6 142.364,42.036 LD68.1 ; LD71.1 142.364,30.336 ; 145.7,22 145.7,20.4 146.1,20 LD73.1 ; 145.7,33 LD70.1 ; 145.7,46 LD67.1 ; 152.3,42.5 153.3,42.5 153.636,42.164 LD69.1 ; LD72.1 153.636,30.464 ; 156.9,42.6 157.8,42.6 158.364,42.036 LD75.1 ; LD78.1 158.364,30.336 ; 161.7,22 161.7,20.4 162.1,20 LD80.1 ; 161.7,33 LD77.1 ; 161.7,46 LD74.1 ; 168.3,42.5 169.3,42.5 169.636,42.164 LD76.1 ; LD79.1 169.636,30.464
  Top Layer w0.4: 13,5.3 LD81.1 ; 25,5.3 LD82.1 ; 37,5.3 LD83.1 ; 49,5.3 LD84.1 ; 61,5.3 LD85.1 ; 83.5,5.3 LD86.1 ; 85,5.3 LD87.1 ; 86.5,5.3 LD88.1 ; 109,5.3 LD89.1 ; 121,5.3 LD90.1 ; 133,5.3 LD91.1 ; 145,5.3 LD92.1 ; 157,5.3 LD93.1
  Top Layer w0.6: 3.7,22 3.7,33 3.7,46 3.7,48 ; 10.3,47.985 10.3,42.5 10.3,31.8 11.636,30.464 ; 13.664,47.985 13.664,42.5 13.664,31.8 15,30.464 ; 16.9,48 16.9,42.6 16.9,31.8 18.364,30.336 ; 21.7,22 21.7,33 21.7,46 21.7,48 ; 28.3,47.985 28.3,42.5 28.3,31.8 29.636,30.464 ; 32.9,48 32.9,42.6 32.9,31.8 34.364,30.336 ; 37.7,22 37.7,33 37.7,46 37.7,48 ; 44.3,47.985 44.3,42.5 44.3,31.8 45.636,30.464 ; 47.664,47.985 47.664,42.5 47.664,31.8 49,30.464 ; 50.9,48 50.9,42.6 50.9,31.8 52.364,30.336 ; 55.7,22 55.7,33 55.7,46 55.7,48 ; 62.3,47.985 62.3,42.5 62.3,31.8 63.636,30.464 ; 66.9,48 66.9,42.6 66.9,31.8 68.364,30.336 ; 71.7,22 71.7,33 71.7,46 71.7,48 ; 78.3,50.8 78.3,42.5 78.3,31.8 79.636,30.464 ; 88.9,48 88.9,42.6 88.9,31.8 90.364,30.336 ; 93.7,22 93.7,33 93.7,46 93.7,48 ; 100.3,47.985 100.3,42.5 100.3,31.8 101.636,30.464 ; 103.664,47.985 103.664,42.5 103.664,31.8 105,30.464 ; 106.9,48 106.9,42.6 106.9,31.8 108.364,30.336 ; 111.7,22 111.7,33 111.7,46 111.7,48 ; 118.3,47.985 118.3,42.5 118.3,31.8 119.636,30.464 ; 122.9,48 122.9,42.6 122.9,31.8 124.364,30.336 ; 127.7,22 127.7,33 127.7,46 127.7,48 ; 130.6,51.2 130.6,54.7 131.9,56 165.1,56 168.3,52.8 168.3,42.5 168.3,31.8 169.636,30.464 ; 134.3,47.985 134.3,42.5 134.3,31.8 135.636,30.464 ; 137.664,47.985 137.664,42.5 137.664,31.8 139,30.464 ; 140.9,48 140.9,42.6 140.9,31.8 142.364,30.336 ; 145.7,22 145.7,33 145.7,46 145.7,48 ; 152.3,47.985 152.3,42.5 152.3,31.8 153.636,30.464 ; 156.9,48 156.9,42.6 156.9,31.8 158.364,30.336 ; 161.7,22 161.7,33 161.7,46 161.7,48
  other v1: 17.4,4.2 51.4,4.2 73.7,4.2 107.4,4.2 141.4,4.2 155.1,4.3 156.2,4.3 17.4,5.1 51.4,5.1 73.7,5.1 107.4,5.1 141.4,5.1 76.5,51.2 77.5,51.2 78.5,51.2 76.5,52.2 77.5,52.2 78.5,52.2 76.5,53.2 77.5,53.2 78.5,53.2 80,57.4 80.1,58.2
  other v2: 80,52.3
pads on no net: CN1.0 U6.18 U6.19 U6.20 U6.22
copper on no net:
  other v1: 77.1,55.1 78.1,55.1 91.9,55.1 92.9,55.1 77.6,56.3 92.4,56.3 77.1,57.5 78.1,57.5 91.9,57.5 92.9,57.5

## Polygon pours and split planes (outlines as drawn)
GND on Bottom Layer "GND_L02_P000" (solid, remove dead copper, pour order 0): -5,65 -5,-5 175,-5 175,65

## Keep-outs
Keep-Out Layer:
  circle w0.254: c0,60 r3.5
  circle w0.254: c170,60 r3.5
  circle w0.254: c170,0 r3.5
  circle w0.254: c0,0 r3.5

## Other copper
Top Layer:
  rectangle: 91.5,54.7 93.3,57.9
  rectangle: 76.7,54.7 78.5,57.9
  region net VCC: 80.5,54 80.5,51.2 79.7,50.4 76.2,50.4 72.9,53.7 69.3,53.7 67.1,55.9 13.6,55.9 11.4,53.7 11.4,50.4 7.9,50.4 7.9,55.5 10.9,58.5 71.5,58.5 76,54
  region net VCC: 96.6,51 96.6,56.3 94.6,58.3 82.5,58.3 80.5,56.3 80.5,54 79.5,54 79.5,58.3 80.6,59.4 98.1,59.4 99.3,58.2 99.3,51
  region net VCC: 4,47.7 1.9,47.7 -0.8,45 -0.8,16.7 0.8,15.1 0.8,8.7 3.9,5.6 14.2,5.6 14.2,3.4 2.3,3.4 -1.9,7.6 -1.9,49.714 -0.4,51 4,51
  region net VCC: 88.6,47.7 88.6,48.7 89.2,49.3 94.4,49.3 96.6,51.5 160.6,51.5 162,50.1 162,47.7
  region net VCC: 72,47.7 72,48.6 71.2,49.4 65.7,49.4 64.1,51 3.4,51 3.4,47.7
  region net VCC: 12.8,5.6 12.8,4.3 13.7,3.4 156.3,3.4 157.2,4.3 157.2,5.6
Bottom Layer:
  region net VCC: 79.5,54 79.5,58.3 79.8,58.6 80.5,58.6 80.5,56.3 80.5,54
  region net VCC: 80.5,54 76,54 76,50.4 79.9,50.4 80.5,51
  region net VCC: 164.95,8.15 163.3,8.15 163.3,5.5 162.5,4.7 154.6,4.7 154.6,3.9 164,3.9 164.95,4.85
  region net VCC: 18.65,8.15 18.025,7.525 18.025,3.7 16.8,3.7 16.8,8.15
  region net VCC: 52.65,8.15 52.025,7.525 52.025,3.7 50.8,3.7 50.8,8.15
  region net VCC: 74.95,8.15 74.325,7.525 74.325,3.7 73.1,3.7 73.1,8.15
  region net VCC: 108.65,8.15 108.025,7.525 108.025,3.7 106.8,3.7 106.8,8.15
  region net VCC: 142.65,8.15 142.025,7.525 142.025,3.7 140.8,3.7 140.8,8.15
  region net VCC: 163.45,11.425 163.45,10.75 162.775,10.075 162.1,10.075 162.1,7.525 164.325,7.525 164.95,8.15 164.95,11.425
  region net GND: 159.15,11.425 159.15,10.75 159.825,10.075 160.5,10.075 160.5,7.525 158.275,7.525 157.65,8.15 157.65,11.425
  region net VCC: 141.15,11.425 141.15,10.75 140.475,10.075 139.8,10.075 139.8,7.525 142.025,7.525 142.65,8.15 142.65,11.425
  region net GND: 136.85,11.425 136.85,10.75 137.525,10.075 138.2,10.075 138.2,7.525 135.975,7.525 135.35,8.15 135.35,11.425
  region net VCC: 107.15,11.425 107.15,10.75 106.475,10.075 105.8,10.075 105.8,7.525 108.025,7.525 108.65,8.15 108.65,11.425
  region net GND: 102.85,11.425 102.85,10.75 103.525,10.075 104.2,10.075 104.2,7.525 101.975,7.525 101.35,8.15 101.35,11.425
  region net VCC: 73.45,11.425 73.45,10.75 72.775,10.075 72.1,10.075 72.1,7.525 74.325,7.525 74.95,8.15 74.95,11.425
  region net GND: 69.15,11.425 69.15,10.75 69.825,10.075 70.5,10.075 70.5,7.525 68.275,7.525 67.65,8.15 67.65,11.425
  region net VCC: 51.15,11.425 51.15,10.75 50.475,10.075 49.8,10.075 49.8,7.525 52.025,7.525 52.65,8.15 52.65,11.425
  region net GND: 46.85,11.425 46.85,10.75 47.525,10.075 48.2,10.075 48.2,7.525 45.975,7.525 45.35,8.15 45.35,11.425
  region net GND: 12.85,11.425 12.85,10.75 13.525,10.075 14.2,10.075 14.2,7.525 11.975,7.525 11.35,8.15 11.35,11.425
  region net VCC: 17.15,11.425 17.15,10.75 16.475,10.075 15.8,10.075 15.8,7.525 18.025,7.525 18.65,8.15 18.65,11.425

## Silkscreen, mask and mechanical layers (free items; w line width, h text height)
Top Overlay:
  drawing of 554 lines, arcs and shapes, not listed
Bottom Overlay:
  text "VCC" at 78.95,47 h1.5 r270
  text "GND" at 81.392,47 h1.5 r270
  text "SDI" at 83.52,47 h1.5 r270
  text "SCK" at 85.52,47 h1.5 r270
  text "LAT" at 87.52,47 h1.5 r270
  text "BLANK" at 89.52,46 h1.5 r270
  text "SamC / 07/2021" at 10.313,2.238 h1.8
Mechanical 1:
  the board outline again, w0.8
Mechanical 50:
  circle w0.1: c0,60 r1.5
  circle w0.1: c0,0 r1.5
  circle w0.1: c170,0 r1.5
  circle w0.1: c170,60 r1.5
  circle w0.05: c13,8 r1
  circle w0.05: c25,8 r1
  circle w0.05: c37,8 r1
  circle w0.05: c49,8 r1
  circle w0.05: c61,8 r1
  circle w0.05: c85,8 r1
  circle w0.05: c139,54 r1
  circle w0.05: c31,54 r1
  circle w0.05: c109,8 r1
  circle w0.05: c121,8 r1
  circle w0.05: c133,8 r1
  circle w0.05: c0.364,26.5 r1
  circle w0.05: c6,20 r1
  circle w0.05: c11.636,26.5 r1
  circle w0.05: c11.636,39.5 r1
  circle w0.05: c6,46 r1
  circle w0.05: c0.364,39.5 r1
  circle w0.05: c6,33 r1
  circle w0.05: c18.364,26.5 r1
  circle w0.05: c24,20 r1
  circle w0.05: c29.636,26.5 r1
  circle w0.05: c29.636,39.5 r1
  circle w0.05: c24,46 r1
  circle w0.05: c18.364,39.5 r1
  circle w0.05: c24,33 r1
  circle w0.05: c34.364,26.5 r1
  circle w0.05: c40,20 r1
  circle w0.05: c45.636,26.5 r1
  circle w0.05: c45.636,39.5 r1
  circle w0.05: c40,46 r1
  circle w0.05: c34.364,39.5 r1
  circle w0.05: c40,33 r1
  circle w0.05: c52.364,26.5 r1
  circle w0.05: c58,20 r1
  circle w0.05: c63.636,26.5 r1
  circle w0.05: c63.636,39.5 r1
  circle w0.05: c58,46 r1
  circle w0.05: c52.364,39.5 r1
  circle w0.05: c58,33 r1
  circle w0.05: c68.364,26.5 r1
  circle w0.05: c74,20 r1
  circle w0.05: c79.636,26.5 r1
  circle w0.05: c79.636,39.5 r1
  circle w0.05: c74,46 r1
  circle w0.05: c68.364,39.5 r1
  circle w0.05: c74,33 r1
  circle w0.05: c90.364,26.5 r1
  circle w0.05: c96,20 r1
  circle w0.05: c101.636,26.5 r1
  circle w0.05: c101.636,39.5 r1
  circle w0.05: c96,46 r1
  circle w0.05: c90.364,39.5 r1
  circle w0.05: c96,33 r1
  circle w0.05: c108.364,26.5 r1
  circle w0.05: c114,20 r1
  circle w0.05: c119.636,26.5 r1
  circle w0.05: c119.636,39.5 r1
  circle w0.05: c114,46 r1
  circle w0.05: c108.364,39.5 r1
  circle w0.05: c114,33 r1
  circle w0.05: c124.364,26.5 r1
  circle w0.05: c130,20 r1
  circle w0.05: c135.636,26.5 r1
  circle w0.05: c135.636,39.5 r1
  circle w0.05: c130,46 r1
  circle w0.05: c124.364,39.5 r1
  circle w0.05: c130,33 r1
  circle w0.05: c142.364,26.5 r1
  circle w0.05: c148,20 r1
  circle w0.05: c153.636,26.5 r1
  circle w0.05: c145,8 r1
  circle w0.05: c153.636,39.5 r1
  circle w0.05: c148,46 r1
  circle w0.05: c142.364,39.5 r1
  circle w0.05: c148,33 r1
  circle w0.05: c157,8 r1
  circle w0.05: c158.364,26.5 r1
  circle w0.05: c164,20 r1
  circle w0.05: c169.636,26.5 r1
  circle w0.05: c169.636,39.5 r1
  circle w0.05: c164,46 r1
  circle w0.05: c158.364,39.5 r1
  circle w0.05: c164,33 r1
  circle w0.05: c6,33 r1
  circle w0.05: c139,26.5 r1
  circle w0.05: c139,39.5 r1
  circle w0.05: c105,26.5 r1
  circle w0.05: c105,39.5 r1
  circle w0.05: c49,26.5 r1
  circle w0.05: c49,39.5 r1
  circle w0.05: c15,26.5 r1
  circle w0.05: c15,39.5 r1
  circle w0.05: c96,33 r1
  circle w0.05: c114,33 r1
  circle w0.05: c130,33 r1
  circle w0.05: c148,33 r1
  circle w0.05: c164,33 r1
  circle w0.05: c74,33 r1
  circle w0.05: c58,33 r1
  circle w0.05: c40,33 r1
  circle w0.05: c24,33 r1
  circle w0.05: c6,33 r1
  circle w0.05: c6,33 r1
  circle w0.05: c24,33 r1
  circle w0.05: c40,33 r1
  circle w0.05: c58,33 r1
  circle w0.05: c74,33 r1